# Altium PCB 660-XEMS91-CELLS.PcbDoc
Units mil, origin at the board's own origin, x right, y up, seen from the top; angles counter-clockwise.
Board outline 6222.84 x 4430.71 mil, 4 copper layers (Top Layer, MidLayer1, MidLayer2, Bottom Layer); 8 components, 0 nets, 5 pads, 0 vias.
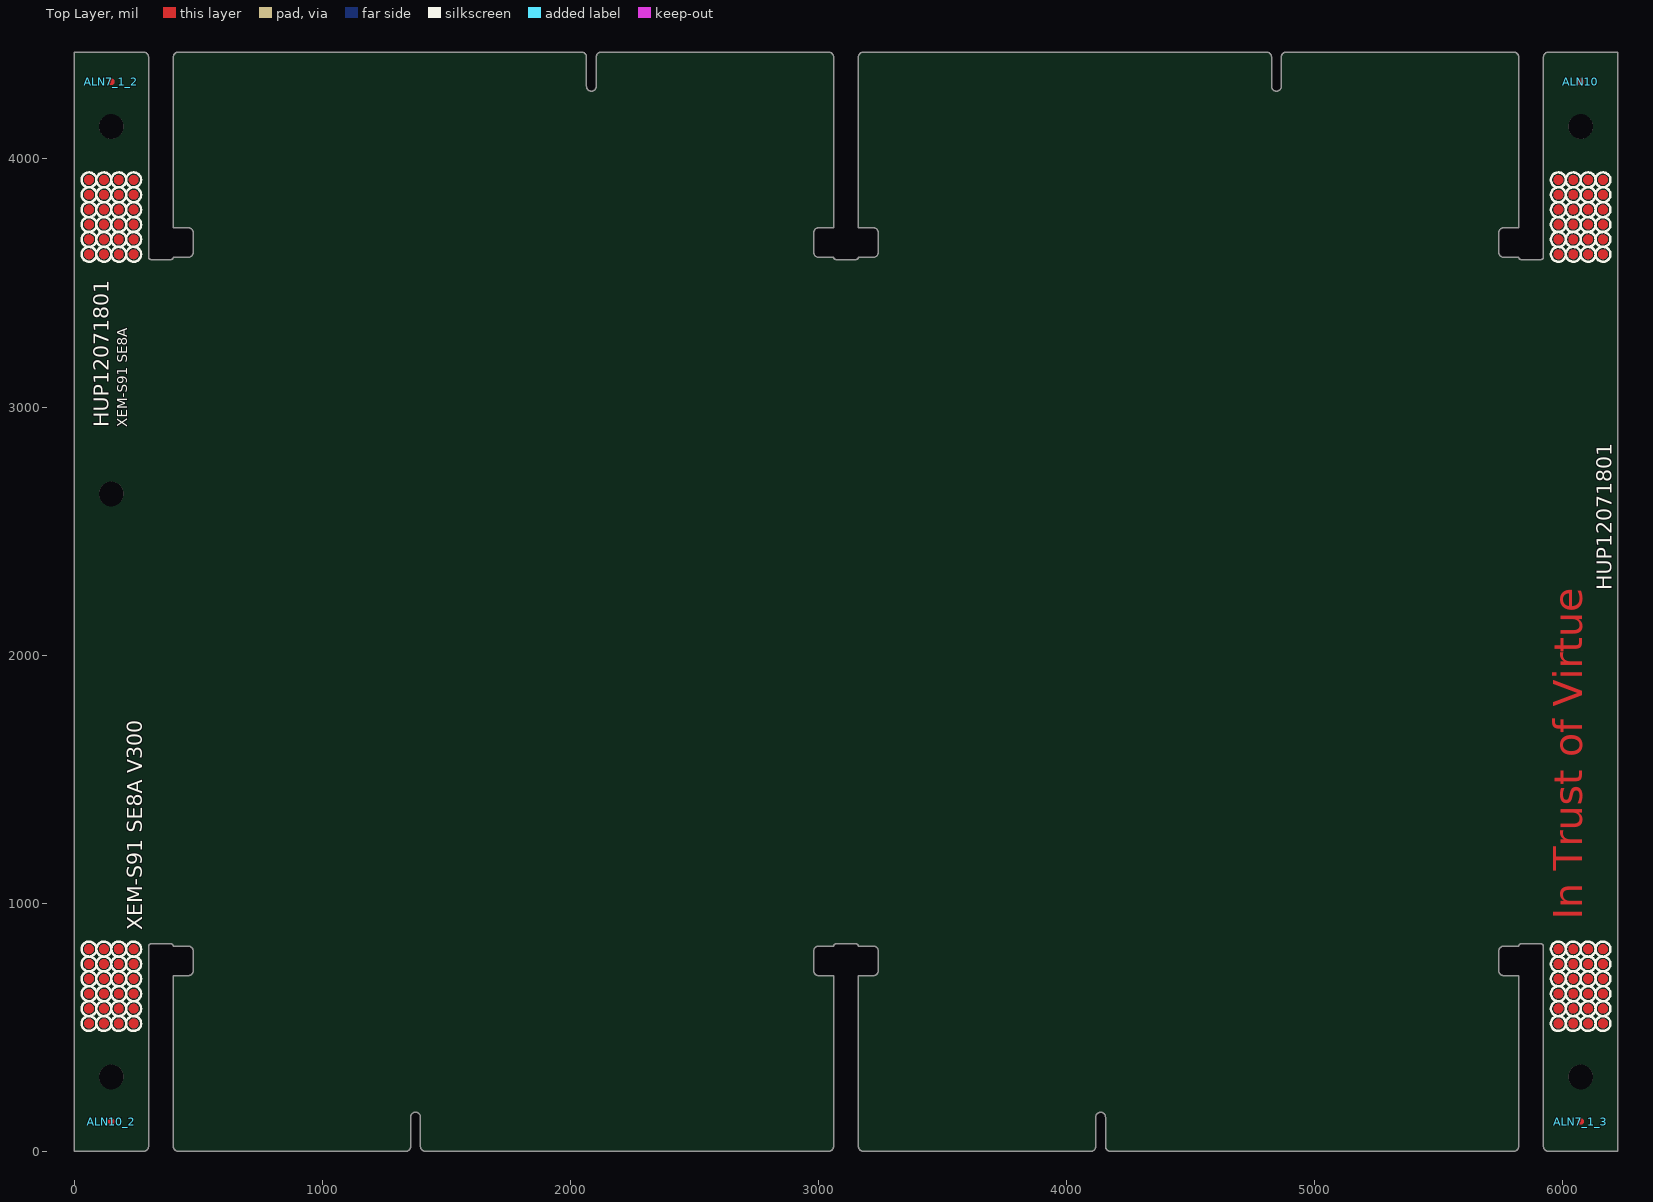
[diagram p0: Top Layer view]
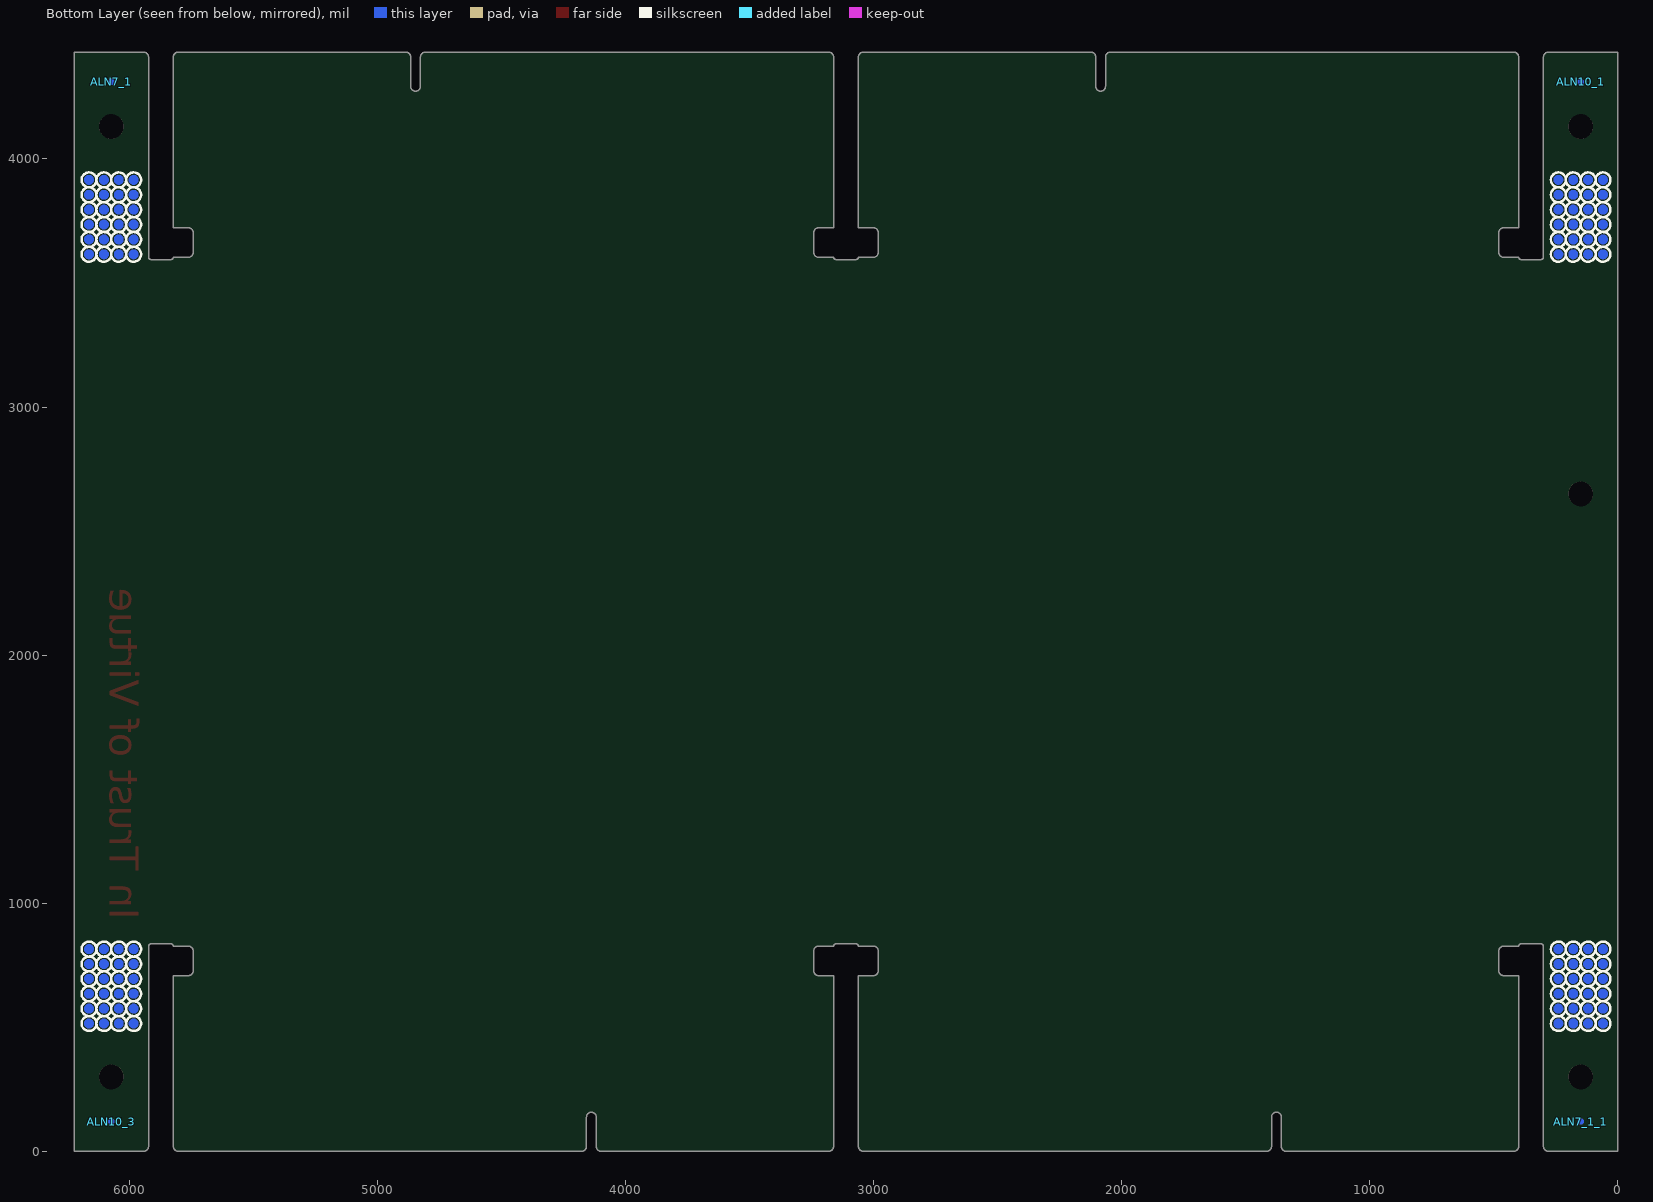
[diagram p1: Bottom Layer view, seen from below]
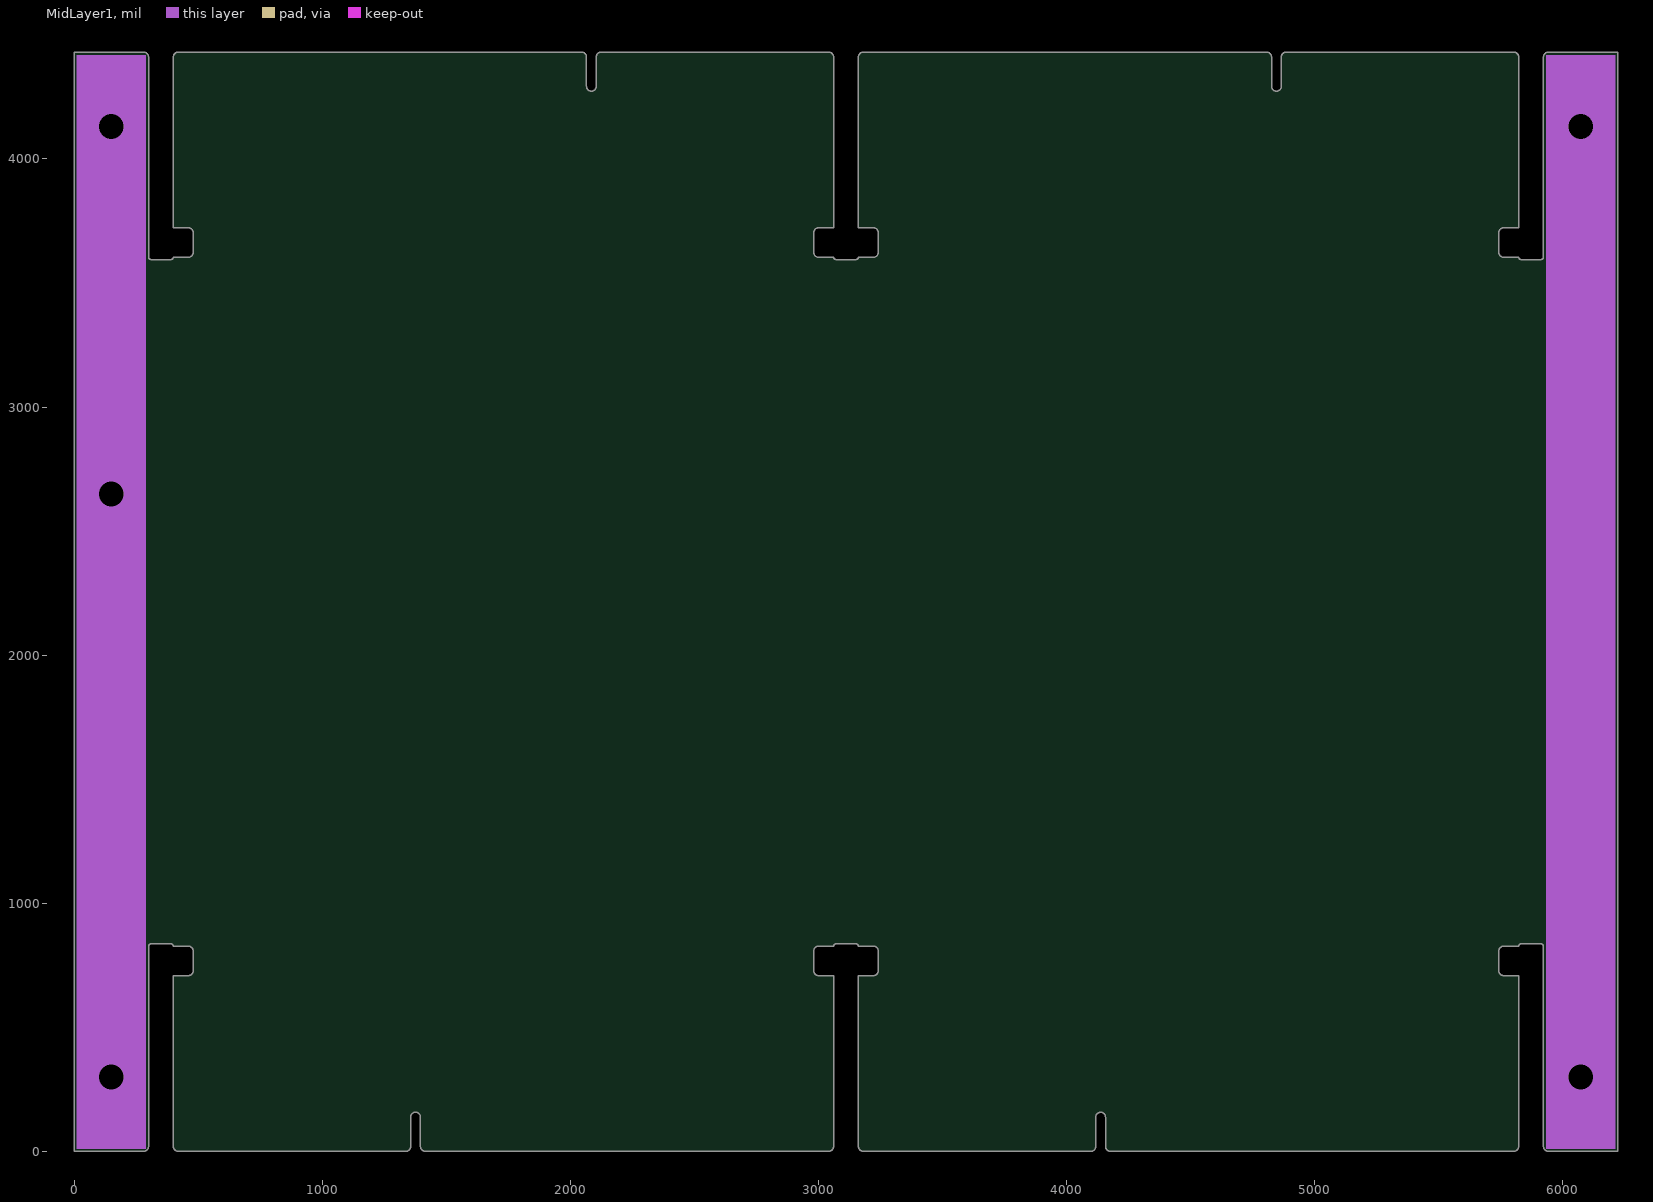
[diagram p2: MidLayer1]
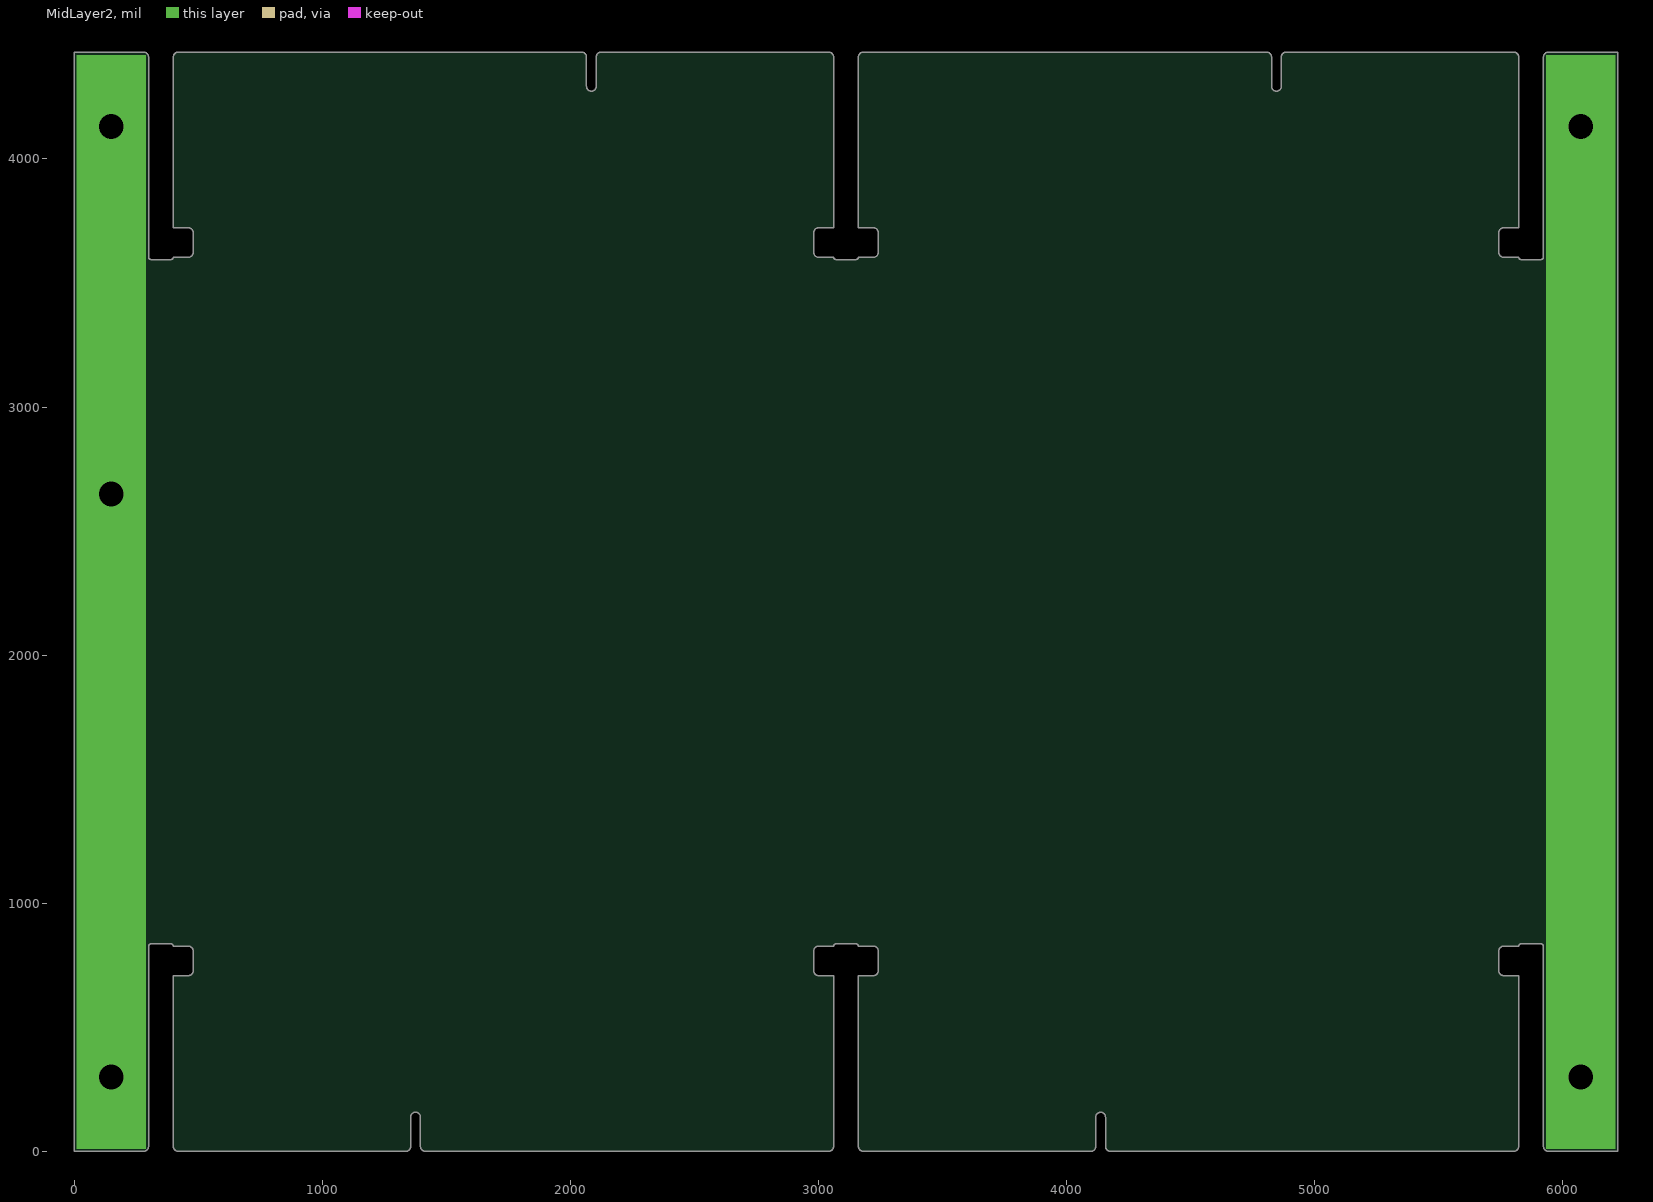
[diagram p3: MidLayer2]

## Layer stack, top to bottom
Top Layer: signal copper 1.4
Dielectric: core 12.6, FR-4, Dk 4.8
MidLayer1: signal copper 1.4
Dielectric: prepreg 12.6, FR-4, Dk 4.8
MidLayer2: signal copper 1.4
Dielectric: core 12.6, FR-4, Dk 4.8
Bottom Layer: signal copper 1.4

## Board outline
0,0 280.32,0 ccw(c280.32,19.68) 300,19.68 300,826.14 cw(c310,826.14) 310,836.14 390,836.14 cw(c390,826.14) 399.96,827 400,827 460,827 cw(c460,807) 480,807 480,728 cw(c460,728) 460,708 400,708 400,19.68 ccw(c419.68,19.68) 419.68,0 1337.01,0 ccw(c1337.01,19.68) 1356.69,19.68 1356.69,137.8 cw(c1376.38,137.8) 1396.06,137.8 1396.06,19.68 ccw(c1415.75,19.68) 1415.75,0 3041.73,0 ccw(c3041.73,19.68) 3061.42,19.68 3061.42,19.02 3061.42,708 3001.42,708 cw(c3001.42,728) 2981.42,728 2981.42,807 cw(c3001.42,807) 3001.42,827 3061.42,827 3061.45,827 cw(c3071.42,826.14) 3071.42,836.14 3151.42,836.14 cw(c3151.42,826.14) 3161.38,827 3161.42,827 3221.42,827 cw(c3221.42,807) 3241.42,807 3241.42,728 cw(c3221.42,728) 3221.42,708 3161.42,708 3161.42,19.68 ccw(c3181.1,19.68) 3181.1,0 4098.43,0 ccw(c4098.43,19.68) 4118.11,19.68 4118.11,137.8 cw(c4137.8,137.8) 4157.48,137.8 4157.48,19.68 ccw(c4177.17,19.68) 4177.17,0 5803.15,0 ccw(c5803.15,19.68) 5822.83,19.68 5822.83,19.02 5822.83,708 5762.83,708 cw(c5762.83,728) 5742.83,728 5742.83,807 cw(c5762.83,807) 5762.83,827 5822.83,827 5822.87,827 cw(c5832.84,826.14) 5832.84,836.14 5912.84,836.14 cw(c5912.84,826.14) 5922.84,826.14 5922.84,19.68 ccw(c5942.52,19.68) 5942.52,0 6222.84,0 6222.84,4430.71 5942.52,4430.71 ccw(c5942.52,4411.02) 5922.84,4411.02 5922.84,3604.57 cw(c5912.84,3604.57) 5912.84,3594.57 5832.84,3594.57 cw(c5832.84,3604.57) 5822.87,3603.71 5822.84,3603.71 5762.84,3603.71 cw(c5762.84,3623.71) 5742.84,3623.71 5742.84,3702.71 cw(c5762.84,3702.71) 5762.84,3722.71 5822.84,3722.71 5822.84,4411.02 ccw(c5803.15,4411.02) 5803.15,4430.71 4885.83,4430.71 ccw(c4885.83,4411.02) 4866.14,4411.02 4866.14,4292.91 cw(c4846.46,4292.91) 4826.77,4292.91 4826.77,4411.02 ccw(c4807.09,4411.02) 4807.09,4430.71 3181.1,4430.71 ccw(c3181.1,4411.02) 3161.42,4411.02 3161.42,4411.68 3161.42,3722.71 3221.42,3722.71 cw(c3221.42,3702.71) 3241.42,3702.71 3241.42,3623.71 cw(c3221.42,3623.71) 3221.42,3603.71 3161.42,3603.71 3161.38,3603.71 cw(c3151.42,3604.57) 3151.42,3594.57 3071.42,3594.57 cw(c3071.42,3604.57) 3061.46,3603.71 3061.42,3603.71 3001.42,3603.71 cw(c3001.42,3623.71) 2981.42,3623.71 2981.42,3702.71 cw(c3001.42,3702.71) 3001.42,3722.71 3061.42,3722.71 3061.42,4411.02 ccw(c3041.73,4411.02) 3041.73,4430.71 2124.41,4430.71 ccw(c2124.41,4411.02) 2104.73,4411.02 2104.73,4292.91 cw(c2085.04,4292.91) 2065.36,4292.91 2065.36,4411.02 ccw(c2045.67,4411.02) 2045.67,4430.71 419.69,4430.71 ccw(c419.69,4411.02) 400,4411.02 400,4411.68 400,3722.71 460,3722.71 cw(c460,3702.71) 480,3702.71 480,3623.71 cw(c460,3623.71) 460,3603.71 400,3603.71 399.96,3603.71 cw(c390,3604.57) 390,3594.57 310,3594.57 cw(c310,3604.57) 300,3604.57 300,4411.02 ccw(c280.32,4411.02) 280.32,4430.71 0,4430.71

## Design rules (kind name [scope] priority, off if disabled: settings)
Clearance [All] p1: gap=10
FabricationTestPointUsage TestPointUsage [All] p1: valid=0 allowmultiple=FALSE
FabricationTestpoint Testpoint [All] p1: side=3 testpointundercomponent=TRUE minsize=40 maxsize=100 preferedsize=60 minholesize=0 maxholesize=40 preferedholesize=32 testpointgrid=1 allowsidetop=TRUE allowsidebottom=TRUE usegrid=TRUE gridtolerance=0.01
PolygonConnect [All] p1: connectstyle=Relief reliefconductorwidth=10 reliefentries=4 polygonreliefangle="90 Angle"
RoutingVias [All] p1: holewidth=28 width=50 viastyle="Through Hole" minholewidth=28 minwidth=50 maxholewidth=28 maxwidth=50
SilkscreenOverComponentPads [All] p1: minsilkscreentomaskgap=10
SolderMaskExpansion [All] p1: expansion=4
Width [All] p1: maxlimit=100 minlimit=5 preferedwidth=10
25 further rules are at their usual default settings.

## Components (designator, comment, footprint, x,y, rotation, side; value= is the part's Value field where it differs from the comment)
ALN7_1 "Test Point" ALIGN 6072.84,4310.71 r180 bottom (schematic designator ALN6)
ALN7_1_1 "Test Point" ALIGN 150,120 r0 bottom (schematic designator ALN6)
ALN7_1_2 "Test Point" ALIGN 150,4310.71 r0 top (schematic designator ALN6)
ALN7_1_3 "Test Point" ALIGN 6072.84,120 r180 top (schematic designator ALN6)
ALN10 "Test Point" ALIGN 6072.84,4310.71 r0 top (schematic designator ALN6)
ALN10_1 "Test Point" ALIGN 150,4310.71 r180 bottom (schematic designator ALN6)
ALN10_2 "Test Point" ALIGN 150,120 r180 top (schematic designator ALN6)
ALN10_3 "Test Point" ALIGN 6072.84,120 r0 bottom (schematic designator ALN6)

## Footprints (in the part's own frame and the unit in brackets; to place one, negate y for a bottom-side part, rotate by r counter-clockwise, add the part's x,y. Pads: shape width x height; smd on the part's side, far side on the other; paste and mask are expansions set on the pad)
ALIGN [mil]
  Top Layer circle w16: c0,0 r5

## Part data
ALN7_1 ALN7_1_1 ALN7_1_2 ALN7_1_3 ALN10 ALN10_1 ALN10_2 ALN10_3: library part ALIGN

## Free pads (board coordinates)
  round 98 hole 100: 0(150,300) 0(150,2650) 0(150,4130.71) 0(6072.84,300) 0(6072.84,4130.71)

## Nets (pads, with @x,y where several pads share a name; then routed paths per layer and width w, separated by ;. In a path a pad name is that pad's centre, name@x,y a point inside that pad or via, vN(x,y) a via of type N, cw(c..) or ccw(c..) an arc to the next point about the centre after c; other vN are vias at no path point)
copper on no net: | length 12063.7
  Top Layer w20: 70,515 ccw(c60,515) 70,515 ; 70,575 ccw(c60,575) 70,575 ; 70,635 ccw(c60,635) 70,635 ; 70,695 ccw(c60,695) 70,695 ; 70,755 ccw(c60,755) 70,755 ; 70,815 ccw(c60,815) 70,815 ; 70,3615.71 ccw(c60,3615.71) 70,3615.71 ; 70,3675.71 ccw(c60,3675.71) 70,3675.71 ; 70,3735.71 ccw(c60,3735.71) 70,3735.71 ; 70,3795.71 ccw(c60,3795.71) 70,3795.71 ; 70,3855.71 ccw(c60,3855.71) 70,3855.71 ; 70,3915.71 ccw(c60,3915.71) 70,3915.71 ; 130,515 ccw(c120,515) 130,515 ; 130,575 ccw(c120,575) 130,575 ; 130,635 ccw(c120,635) 130,635 ; 130,695 ccw(c120,695) 130,695 ; 130,755 ccw(c120,755) 130,755 ; 130,815 ccw(c120,815) 130,815 ; 130,3615.71 ccw(c120,3615.71) 130,3615.71 ; 130,3675.71 ccw(c120,3675.71) 130,3675.71 ; 130,3735.71 ccw(c120,3735.71) 130,3735.71 ; 130,3795.71 ccw(c120,3795.71) 130,3795.71 ; 130,3855.71 ccw(c120,3855.71) 130,3855.71 ; 130,3915.71 ccw(c120,3915.71) 130,3915.71 ; 190,515 ccw(c180,515) 190,515 ; 190,575 ccw(c180,575) 190,575 ; 190,635 ccw(c180,635) 190,635 ; 190,695 ccw(c180,695) 190,695 ; 190,755 ccw(c180,755) 190,755 ; 190,815 ccw(c180,815) 190,815 ; 190,3615.71 ccw(c180,3615.71) 190,3615.71 ; 190,3675.71 ccw(c180,3675.71) 190,3675.71 ; 190,3735.71 ccw(c180,3735.71) 190,3735.71 ; 190,3795.71 ccw(c180,3795.71) 190,3795.71 ; 190,3855.71 ccw(c180,3855.71) 190,3855.71 ; 190,3915.71 ccw(c180,3915.71) 190,3915.71 ; 250,515 ccw(c240,515) 250,515 ; 250,575 ccw(c240,575) 250,575 ; 250,635 ccw(c240,635) 250,635 ; 250,695 ccw(c240,695) 250,695 ; 250,755 ccw(c240,755) 250,755 ; 250,815 ccw(c240,815) 250,815 ; 250,3615.71 ccw(c240,3615.71) 250,3615.71 ; 250,3675.71 ccw(c240,3675.71) 250,3675.71 ; 250,3735.71 ccw(c240,3735.71) 250,3735.71 ; 250,3795.71 ccw(c240,3795.71) 250,3795.71 ; 250,3855.71 ccw(c240,3855.71) 250,3855.71 ; 250,3915.71 ccw(c240,3915.71) 250,3915.71 ; 5992.84,515 ccw(c5982.84,515) 5992.84,515 ; 5992.84,575 ccw(c5982.84,575) 5992.84,575 ; 5992.84,635 ccw(c5982.84,635) 5992.84,635 ; 5992.84,695 ccw(c5982.84,695) 5992.84,695 ; 5992.84,755 ccw(c5982.84,755) 5992.84,755 ; 5992.84,815 ccw(c5982.84,815) 5992.84,815 ; 5992.84,3615.71 ccw(c5982.84,3615.71) 5992.84,3615.71 ; 5992.84,3675.71 ccw(c5982.84,3675.71) 5992.84,3675.71 ; 5992.84,3735.71 ccw(c5982.84,3735.71) 5992.84,3735.71 ; 5992.84,3795.71 ccw(c5982.84,3795.71) 5992.84,3795.71 ; 5992.84,3855.71 ccw(c5982.84,3855.71) 5992.84,3855.71 ; 5992.84,3915.71 ccw(c5982.84,3915.71) 5992.84,3915.71 ; 6052.84,515 ccw(c6042.84,515) 6052.84,515 ; 6052.84,575 ccw(c6042.84,575) 6052.84,575 ; 6052.84,635 ccw(c6042.84,635) 6052.84,635 ; 6052.84,695 ccw(c6042.84,695) 6052.84,695 ; 6052.84,755 ccw(c6042.84,755) 6052.84,755 ; 6052.84,815 ccw(c6042.84,815) 6052.84,815 ; 6052.84,3615.71 ccw(c6042.84,3615.71) 6052.84,3615.71 ; 6052.84,3675.71 ccw(c6042.84,3675.71) 6052.84,3675.71 ; 6052.84,3735.71 ccw(c6042.84,3735.71) 6052.84,3735.71 ; 6052.84,3795.71 ccw(c6042.84,3795.71) 6052.84,3795.71 ; 6052.84,3855.71 ccw(c6042.84,3855.71) 6052.84,3855.71 ; 6052.84,3915.71 ccw(c6042.84,3915.71) 6052.84,3915.71 ; 6112.84,515 ccw(c6102.84,515) 6112.84,515 ; 6112.84,575 ccw(c6102.84,575) 6112.84,575 ; 6112.84,635 ccw(c6102.84,635) 6112.84,635 ; 6112.84,695 ccw(c6102.84,695) 6112.84,695 ; 6112.84,755 ccw(c6102.84,755) 6112.84,755 ; 6112.84,815 ccw(c6102.84,815) 6112.84,815 ; 6112.84,3615.71 ccw(c6102.84,3615.71) 6112.84,3615.71 ; 6112.84,3675.71 ccw(c6102.84,3675.71) 6112.84,3675.71 ; 6112.84,3735.71 ccw(c6102.84,3735.71) 6112.84,3735.71 ; 6112.84,3795.71 ccw(c6102.84,3795.71) 6112.84,3795.71 ; 6112.84,3855.71 ccw(c6102.84,3855.71) 6112.84,3855.71 ; 6112.84,3915.71 ccw(c6102.84,3915.71) 6112.84,3915.71 ; 6172.84,515 ccw(c6162.84,515) 6172.84,515 ; 6172.84,575 ccw(c6162.84,575) 6172.84,575 ; 6172.84,635 ccw(c6162.84,635) 6172.84,635 ; 6172.84,695 ccw(c6162.84,695) 6172.84,695 ; 6172.84,755 ccw(c6162.84,755) 6172.84,755 ; 6172.84,815 ccw(c6162.84,815) 6172.84,815 ; 6172.84,3615.71 ccw(c6162.84,3615.71) 6172.84,3615.71 ; 6172.84,3675.71 ccw(c6162.84,3675.71) 6172.84,3675.71 ; 6172.84,3735.71 ccw(c6162.84,3735.71) 6172.84,3735.71 ; 6172.84,3795.71 ccw(c6162.84,3795.71) 6172.84,3795.71 ; 6172.84,3855.71 ccw(c6162.84,3855.71) 6172.84,3855.71 ; 6172.84,3915.71 ccw(c6162.84,3915.71) 6172.84,3915.71
  Bottom Layer w20: 70,515 ccw(c60,515) 70,515 ; 70,575 ccw(c60,575) 70,575 ; 70,635 ccw(c60,635) 70,635 ; 70,695 ccw(c60,695) 70,695 ; 70,755 ccw(c60,755) 70,755 ; 70,815 ccw(c60,815) 70,815 ; 70,3615.71 ccw(c60,3615.71) 70,3615.71 ; 70,3675.71 ccw(c60,3675.71) 70,3675.71 ; 70,3735.71 ccw(c60,3735.71) 70,3735.71 ; 70,3795.71 ccw(c60,3795.71) 70,3795.71 ; 70,3855.71 ccw(c60,3855.71) 70,3855.71 ; 70,3915.71 ccw(c60,3915.71) 70,3915.71 ; 130,515 ccw(c120,515) 130,515 ; 130,575 ccw(c120,575) 130,575 ; 130,635 ccw(c120,635) 130,635 ; 130,695 ccw(c120,695) 130,695 ; 130,755 ccw(c120,755) 130,755 ; 130,815 ccw(c120,815) 130,815 ; 130,3615.71 ccw(c120,3615.71) 130,3615.71 ; 130,3675.71 ccw(c120,3675.71) 130,3675.71 ; 130,3735.71 ccw(c120,3735.71) 130,3735.71 ; 130,3795.71 ccw(c120,3795.71) 130,3795.71 ; 130,3855.71 ccw(c120,3855.71) 130,3855.71 ; 130,3915.71 ccw(c120,3915.71) 130,3915.71 ; 190,515 ccw(c180,515) 190,515 ; 190,575 ccw(c180,575) 190,575 ; 190,635 ccw(c180,635) 190,635 ; 190,695 ccw(c180,695) 190,695 ; 190,755 ccw(c180,755) 190,755 ; 190,815 ccw(c180,815) 190,815 ; 190,3615.71 ccw(c180,3615.71) 190,3615.71 ; 190,3675.71 ccw(c180,3675.71) 190,3675.71 ; 190,3735.71 ccw(c180,3735.71) 190,3735.71 ; 190,3795.71 ccw(c180,3795.71) 190,3795.71 ; 190,3855.71 ccw(c180,3855.71) 190,3855.71 ; 190,3915.71 ccw(c180,3915.71) 190,3915.71 ; 250,515 ccw(c240,515) 250,515 ; 250,575 ccw(c240,575) 250,575 ; 250,635 ccw(c240,635) 250,635 ; 250,695 ccw(c240,695) 250,695 ; 250,755 ccw(c240,755) 250,755 ; 250,815 ccw(c240,815) 250,815 ; 250,3615.71 ccw(c240,3615.71) 250,3615.71 ; 250,3675.71 ccw(c240,3675.71) 250,3675.71 ; 250,3735.71 ccw(c240,3735.71) 250,3735.71 ; 250,3795.71 ccw(c240,3795.71) 250,3795.71 ; 250,3855.71 ccw(c240,3855.71) 250,3855.71 ; 250,3915.71 ccw(c240,3915.71) 250,3915.71 ; 5992.84,515 ccw(c5982.84,515) 5992.84,515 ; 5992.84,575 ccw(c5982.84,575) 5992.84,575 ; 5992.84,635 ccw(c5982.84,635) 5992.84,635 ; 5992.84,695 ccw(c5982.84,695) 5992.84,695 ; 5992.84,755 ccw(c5982.84,755) 5992.84,755 ; 5992.84,815 ccw(c5982.84,815) 5992.84,815 ; 5992.84,3615.71 ccw(c5982.84,3615.71) 5992.84,3615.71 ; 5992.84,3675.71 ccw(c5982.84,3675.71) 5992.84,3675.71 ; 5992.84,3735.71 ccw(c5982.84,3735.71) 5992.84,3735.71 ; 5992.84,3795.71 ccw(c5982.84,3795.71) 5992.84,3795.71 ; 5992.84,3855.71 ccw(c5982.84,3855.71) 5992.84,3855.71 ; 5992.84,3915.71 ccw(c5982.84,3915.71) 5992.84,3915.71 ; 6052.84,515 ccw(c6042.84,515) 6052.84,515 ; 6052.84,575 ccw(c6042.84,575) 6052.84,575 ; 6052.84,635 ccw(c6042.84,635) 6052.84,635 ; 6052.84,695 ccw(c6042.84,695) 6052.84,695 ; 6052.84,755 ccw(c6042.84,755) 6052.84,755 ; 6052.84,815 ccw(c6042.84,815) 6052.84,815 ; 6052.84,3615.71 ccw(c6042.84,3615.71) 6052.84,3615.71 ; 6052.84,3675.71 ccw(c6042.84,3675.71) 6052.84,3675.71 ; 6052.84,3735.71 ccw(c6042.84,3735.71) 6052.84,3735.71 ; 6052.84,3795.71 ccw(c6042.84,3795.71) 6052.84,3795.71 ; 6052.84,3855.71 ccw(c6042.84,3855.71) 6052.84,3855.71 ; 6052.84,3915.71 ccw(c6042.84,3915.71) 6052.84,3915.71 ; 6112.84,515 ccw(c6102.84,515) 6112.84,515 ; 6112.84,575 ccw(c6102.84,575) 6112.84,575 ; 6112.84,635 ccw(c6102.84,635) 6112.84,635 ; 6112.84,695 ccw(c6102.84,695) 6112.84,695 ; 6112.84,755 ccw(c6102.84,755) 6112.84,755 ; 6112.84,815 ccw(c6102.84,815) 6112.84,815 ; 6112.84,3615.71 ccw(c6102.84,3615.71) 6112.84,3615.71 ; 6112.84,3675.71 ccw(c6102.84,3675.71) 6112.84,3675.71 ; 6112.84,3735.71 ccw(c6102.84,3735.71) 6112.84,3735.71 ; 6112.84,3795.71 ccw(c6102.84,3795.71) 6112.84,3795.71 ; 6112.84,3855.71 ccw(c6102.84,3855.71) 6112.84,3855.71 ; 6112.84,3915.71 ccw(c6102.84,3915.71) 6112.84,3915.71 ; 6172.84,515 ccw(c6162.84,515) 6172.84,515 ; 6172.84,575 ccw(c6162.84,575) 6172.84,575 ; 6172.84,635 ccw(c6162.84,635) 6172.84,635 ; 6172.84,695 ccw(c6162.84,695) 6172.84,695 ; 6172.84,755 ccw(c6162.84,755) 6172.84,755 ; 6172.84,815 ccw(c6162.84,815) 6172.84,815 ; 6172.84,3615.71 ccw(c6162.84,3615.71) 6172.84,3615.71 ; 6172.84,3675.71 ccw(c6162.84,3675.71) 6172.84,3675.71 ; 6172.84,3735.71 ccw(c6162.84,3735.71) 6172.84,3735.71 ; 6172.84,3795.71 ccw(c6162.84,3795.71) 6172.84,3795.71 ; 6172.84,3855.71 ccw(c6162.84,3855.71) 6172.84,3855.71 ; 6172.84,3915.71 ccw(c6162.84,3915.71) 6172.84,3915.71

## Other copper
Top Layer:
  text "In Trust of Virtue" at 6116.73,933.05 h200 r90
MidLayer1:
  region: 6212.84,4420 5932.84,4420 5932.84,10 6212.84,10
  rectangle: 10,10 290,4420
MidLayer2:
  region: 6212.84,4420 5932.84,4420 5932.84,10 6212.84,10
  rectangle: 10,10 290,4420

## Silkscreen, mask and mechanical layers (free items; w line width, h text height)
Top Overlay:
  circle w10: c6162.84,755 r30
  circle w10: c6162.84,815 r30
  circle w10: c6162.84,635 r30
  circle w10: c6162.84,695 r30
  circle w10: c6162.84,515 r30
  circle w10: c6162.84,575 r30
  circle w10: c6102.84,815 r30
  circle w10: c6102.84,755 r30
  circle w10: c6102.84,575 r30
  circle w10: c6102.84,515 r30
  circle w10: c6102.84,695 r30
  circle w10: c6102.84,635 r30
  circle w10: c6042.84,815 r30
  circle w10: c5982.84,815 r30
  circle w10: c5982.84,755 r30
  circle w10: c6042.84,755 r30
  circle w10: c6042.84,575 r30
  circle w10: c5982.84,575 r30
  circle w10: c5982.84,515 r30
  circle w10: c6042.84,515 r30
  circle w10: c6042.84,695 r30
  circle w10: c5982.84,695 r30
  circle w10: c5982.84,635 r30
  circle w10: c6042.84,635 r30
  circle w10: c5982.84,3675.71 r30
  circle w10: c5982.84,3615.71 r30
  circle w10: c5982.84,3795.71 r30
  circle w10: c5982.84,3735.71 r30
  circle w10: c5982.84,3915.71 r30
  circle w10: c5982.84,3855.71 r30
  circle w10: c6042.84,3615.71 r30
  circle w10: c6042.84,3675.71 r30
  circle w10: c6042.84,3855.71 r30
  circle w10: c6042.84,3915.71 r30
  circle w10: c6042.84,3735.71 r30
  circle w10: c6042.84,3795.71 r30
  circle w10: c6102.84,3615.71 r30
  circle w10: c6162.84,3615.71 r30
  circle w10: c6162.84,3675.71 r30
  circle w10: c6102.84,3675.71 r30
  circle w10: c6102.84,3855.71 r30
  circle w10: c6162.84,3855.71 r30
  circle w10: c6162.84,3915.71 r30
  circle w10: c6102.84,3915.71 r30
  circle w10: c6102.84,3735.71 r30
  circle w10: c6162.84,3735.71 r30
  circle w10: c6162.84,3795.71 r30
  circle w10: c6102.84,3795.71 r30
  circle w10: c60,3675.71 r30
  circle w10: c60,3615.71 r30
  circle w10: c60,3795.71 r30
  circle w10: c60,3735.71 r30
  circle w10: c60,3915.71 r30
  circle w10: c60,3855.71 r30
  circle w10: c120,3615.71 r30
  circle w10: c120,3675.71 r30
  circle w10: c120,3855.71 r30
  circle w10: c120,3915.71 r30
  circle w10: c120,3735.71 r30
  circle w10: c120,3795.71 r30
  circle w10: c180,3615.71 r30
  circle w10: c240,3615.71 r30
  circle w10: c240,3675.71 r30
  circle w10: c180,3675.71 r30
  circle w10: c180,3855.71 r30
  circle w10: c240,3855.71 r30
  circle w10: c240,3915.71 r30
  circle w10: c180,3915.71 r30
  circle w10: c180,3735.71 r30
  circle w10: c240,3735.71 r30
  circle w10: c240,3795.71 r30
  circle w10: c180,3795.71 r30
  circle w10: c120,635 r30
  circle w10: c60,635 r30
  circle w10: c60,695 r30
  circle w10: c120,695 r30
  circle w10: c120,515 r30
  circle w10: c60,515 r30
  circle w10: c60,575 r30
  circle w10: c120,575 r30
  circle w10: c120,755 r30
  circle w10: c60,755 r30
  circle w10: c60,815 r30
  circle w10: c120,815 r30
  circle w10: c180,635 r30
  circle w10: c180,695 r30
  circle w10: c180,515 r30
  circle w10: c180,575 r30
  circle w10: c180,755 r30
  circle w10: c180,815 r30
  circle w10: c240,575 r30
  circle w10: c240,515 r30
  circle w10: c240,695 r30
  circle w10: c240,635 r30
  circle w10: c240,815 r30
  circle w10: c240,755 r30
  text "HUP12071801" at 140,2919.29 h60 r90
  text "XEM-S91 SE8A" at 215,2919.29 h40 r90
  text "HUP12071801" at 6197.84,2260.71 h60 r90
  text "XEM-S91 SE8A V300" at 275,890 h60 r90
Bottom Overlay:
  circle w10: c6102.84,635 r30
  circle w10: c6162.84,635 r30
  circle w10: c6162.84,695 r30
  circle w10: c6102.84,695 r30
  circle w10: c6102.84,515 r30
  circle w10: c6162.84,515 r30
  circle w10: c6162.84,575 r30
  circle w10: c6102.84,575 r30
  circle w10: c6102.84,755 r30
  circle w10: c6162.84,755 r30
  circle w10: c6162.84,815 r30
  circle w10: c6102.84,815 r30
  circle w10: c6042.84,635 r30
  circle w10: c6042.84,695 r30
  circle w10: c6042.84,515 r30
  circle w10: c6042.84,575 r30
  circle w10: c6042.84,755 r30
  circle w10: c6042.84,815 r30
  circle w10: c5982.84,575 r30
  circle w10: c5982.84,515 r30
  circle w10: c5982.84,695 r30
  circle w10: c5982.84,635 r30
  circle w10: c5982.84,815 r30
  circle w10: c5982.84,755 r30
  circle w10: c6042.84,3795.71 r30
  circle w10: c5982.84,3795.71 r30
  circle w10: c5982.84,3735.71 r30
  circle w10: c6042.84,3735.71 r30
  circle w10: c6042.84,3915.71 r30
  circle w10: c5982.84,3915.71 r30
  circle w10: c5982.84,3855.71 r30
  circle w10: c6042.84,3855.71 r30
  circle w10: c6042.84,3675.71 r30
  circle w10: c5982.84,3675.71 r30
  circle w10: c5982.84,3615.71 r30
  circle w10: c6042.84,3615.71 r30
  circle w10: c6102.84,3795.71 r30
  circle w10: c6102.84,3735.71 r30
  circle w10: c6102.84,3915.71 r30
  circle w10: c6102.84,3855.71 r30
  circle w10: c6102.84,3675.71 r30
  circle w10: c6102.84,3615.71 r30
  circle w10: c6162.84,3855.71 r30
  circle w10: c6162.84,3915.71 r30
  circle w10: c6162.84,3735.71 r30
  circle w10: c6162.84,3795.71 r30
  circle w10: c6162.84,3615.71 r30
  circle w10: c6162.84,3675.71 r30
  circle w10: c120,3795.71 r30
  circle w10: c60,3795.71 r30
  circle w10: c60,3735.71 r30
  circle w10: c120,3735.71 r30
  circle w10: c120,3915.71 r30
  circle w10: c60,3915.71 r30
  circle w10: c60,3855.71 r30
  circle w10: c120,3855.71 r30
  circle w10: c120,3675.71 r30
  circle w10: c60,3675.71 r30
  circle w10: c60,3615.71 r30
  circle w10: c120,3615.71 r30
  circle w10: c180,3795.71 r30
  circle w10: c180,3735.71 r30
  circle w10: c180,3915.71 r30
  circle w10: c180,3855.71 r30
  circle w10: c180,3675.71 r30
  circle w10: c180,3615.71 r30
  circle w10: c240,3855.71 r30
  circle w10: c240,3915.71 r30
  circle w10: c240,3735.71 r30
  circle w10: c240,3795.71 r30
  circle w10: c240,3615.71 r30
  circle w10: c240,3675.71 r30
  circle w10: c60,755 r30
  circle w10: c60,815 r30
  circle w10: c60,635 r30
  circle w10: c60,695 r30
  circle w10: c60,515 r30
  circle w10: c60,575 r30
  circle w10: c120,815 r30
  circle w10: c120,755 r30
  circle w10: c120,575 r30
  circle w10: c120,515 r30
  circle w10: c120,695 r30
  circle w10: c120,635 r30
  circle w10: c180,815 r30
  circle w10: c240,815 r30
  circle w10: c240,755 r30
  circle w10: c180,755 r30
  circle w10: c180,575 r30
  circle w10: c240,575 r30
  circle w10: c240,515 r30
  circle w10: c180,515 r30
  circle w10: c180,695 r30
  circle w10: c240,695 r30
  circle w10: c240,635 r30
  circle w10: c180,635 r30
Top Solder:
  circle w24: c6162.84,815 r10
  circle w24: c6102.84,815 r10
  circle w24: c6102.84,755 r10
  circle w24: c6162.84,755 r10
  circle w24: c6162.84,575 r10
  circle w24: c6102.84,575 r10
  circle w24: c6102.84,515 r10
  circle w24: c6162.84,515 r10
  circle w24: c6162.84,695 r10
  circle w24: c6102.84,695 r10
  circle w24: c6102.84,635 r10
  circle w24: c6162.84,635 r10
  circle w24: c6042.84,815 r10
  circle w24: c5982.84,815 r10
  circle w24: c5982.84,755 r10
  circle w24: c6042.84,755 r10
  circle w24: c6042.84,575 r10
  circle w24: c5982.84,575 r10
  circle w24: c5982.84,515 r10
  circle w24: c6042.84,515 r10
  circle w24: c6042.84,695 r10
  circle w24: c5982.84,695 r10
  circle w24: c5982.84,635 r10
  circle w24: c6042.84,635 r10
  circle w24: c5982.84,3615.71 r10
  circle w24: c6042.84,3615.71 r10
  circle w24: c6042.84,3675.71 r10
  circle w24: c5982.84,3675.71 r10
  circle w24: c5982.84,3855.71 r10
  circle w24: c6042.84,3855.71 r10
  circle w24: c6042.84,3915.71 r10
  circle w24: c5982.84,3915.71 r10
  circle w24: c5982.84,3735.71 r10
  circle w24: c6042.84,3735.71 r10
  circle w24: c6042.84,3795.71 r10
  circle w24: c5982.84,3795.71 r10
  circle w24: c6102.84,3615.71 r10
  circle w24: c6162.84,3615.71 r10
  circle w24: c6162.84,3675.71 r10
  circle w24: c6102.84,3675.71 r10
  circle w24: c6102.84,3855.71 r10
  circle w24: c6162.84,3855.71 r10
  circle w24: c6162.84,3915.71 r10
  circle w24: c6102.84,3915.71 r10
  circle w24: c6102.84,3735.71 r10
  circle w24: c6162.84,3735.71 r10
  circle w24: c6162.84,3795.71 r10
  circle w24: c6102.84,3795.71 r10
  circle w24: c60,3615.71 r10
  circle w24: c120,3615.71 r10
  circle w24: c120,3675.71 r10
  circle w24: c60,3675.71 r10
  circle w24: c60,3855.71 r10
  circle w24: c120,3855.71 r10
  circle w24: c120,3915.71 r10
  circle w24: c60,3915.71 r10
  circle w24: c60,3735.71 r10
  circle w24: c120,3735.71 r10
  circle w24: c120,3795.71 r10
  circle w24: c60,3795.71 r10
  circle w24: c180,3615.71 r10
  circle w24: c240,3615.71 r10
  circle w24: c240,3675.71 r10
  circle w24: c180,3675.71 r10
  circle w24: c180,3855.71 r10
  circle w24: c240,3855.71 r10
  circle w24: c240,3915.71 r10
  circle w24: c180,3915.71 r10
  circle w24: c180,3735.71 r10
  circle w24: c240,3735.71 r10
  circle w24: c240,3795.71 r10
  circle w24: c180,3795.71 r10
  circle w24: c120,635 r10
  circle w24: c60,635 r10
  circle w24: c60,695 r10
  circle w24: c120,695 r10
  circle w24: c120,515 r10
  circle w24: c60,515 r10
  circle w24: c60,575 r10
  circle w24: c120,575 r10
  circle w24: c120,755 r10
  circle w24: c60,755 r10
  circle w24: c60,815 r10
  circle w24: c120,815 r10
  circle w24: c240,635 r10
  circle w24: c180,635 r10
  circle w24: c180,695 r10
  circle w24: c240,695 r10
  circle w24: c240,515 r10
  circle w24: c180,515 r10
  circle w24: c180,575 r10
  circle w24: c240,575 r10
  circle w24: c240,755 r10
  circle w24: c180,755 r10
  circle w24: c180,815 r10
  circle w24: c240,815 r10
  lines w20: 300,836.14 300,936.14 ; 300,1587.01 300,1687.01 ; 300,2743.7 300,2843.7 ; 300,3494.57 300,3594.57 ; 400,836.14 400,936.14 ; 400,1587.01 400,1687.01 ; 400,2743.7 400,2843.7 ; 400,3494.57 400,3594.57 ; 790,2165.35 890,2165.35 ; 790,2265.35 890,2265.35 ; 1680,2165.35 1780,2165.35 ; 1680,2265.35 1780,2265.35 ; 2571.42,2165.36 2671.42,2165.36 ; 2571.42,2265.36 2671.42,2265.36 ; 3061.42,836.14 3061.42,936.14 ; 3061.42,1587.01 3061.42,1687.01 ; 3061.42,2743.7 3061.42,2843.7 ; 3061.42,3494.57 3061.42,3594.57 ; 3161.42,836.14 3161.42,936.14 ; 3161.42,1587.01 3161.42,1687.01 ; 3161.42,2743.7 3161.42,2843.7 ; 3161.42,3494.57 3161.42,3594.57 ; 3551.42,2165.35 3651.42,2165.35 ; 3551.42,2265.35 3651.42,2265.35 ; 4441.42,2165.35 4541.42,2165.35 ; 4441.42,2265.35 4541.42,2265.35 ; 5332.84,2165.36 5432.84,2165.36 ; 5332.84,2265.36 5432.84,2265.36 ; 5822.84,836.14 5822.84,936.14 ; 5822.84,1587.01 5822.84,1687.01 ; 5822.84,2743.7 5822.84,2843.7 ; 5822.84,3494.57 5822.84,3594.57 ; 5922.84,836.14 5922.84,936.14 ; 5922.84,1587.01 5922.84,1687.01 ; 5922.84,2743.7 5922.84,2843.7 ; 5922.84,3494.57 5922.84,3594.57
  text "In Trust of Virtue" at 6116.73,933.05 h200 r90
Bottom Solder:
  circle w24: c6102.84,635 r10
  circle w24: c6162.84,635 r10
  circle w24: c6162.84,695 r10
  circle w24: c6102.84,695 r10
  circle w24: c6102.84,515 r10
  circle w24: c6162.84,515 r10
  circle w24: c6162.84,575 r10
  circle w24: c6102.84,575 r10
  circle w24: c6102.84,755 r10
  circle w24: c6162.84,755 r10
  circle w24: c6162.84,815 r10
  circle w24: c6102.84,815 r10
  circle w24: c5982.84,635 r10
  circle w24: c6042.84,635 r10
  circle w24: c6042.84,695 r10
  circle w24: c5982.84,695 r10
  circle w24: c5982.84,515 r10
  circle w24: c6042.84,515 r10
  circle w24: c6042.84,575 r10
  circle w24: c5982.84,575 r10
  circle w24: c5982.84,755 r10
  circle w24: c6042.84,755 r10
  circle w24: c6042.84,815 r10
  circle w24: c5982.84,815 r10
  circle w24: c6042.84,3795.71 r10
  circle w24: c5982.84,3795.71 r10
  circle w24: c5982.84,3735.71 r10
  circle w24: c6042.84,3735.71 r10
  circle w24: c6042.84,3915.71 r10
  circle w24: c5982.84,3915.71 r10
  circle w24: c5982.84,3855.71 r10
  circle w24: c6042.84,3855.71 r10
  circle w24: c6042.84,3675.71 r10
  circle w24: c5982.84,3675.71 r10
  circle w24: c5982.84,3615.71 r10
  circle w24: c6042.84,3615.71 r10
  circle w24: c6162.84,3795.71 r10
  circle w24: c6102.84,3795.71 r10
  circle w24: c6102.84,3735.71 r10
  circle w24: c6162.84,3735.71 r10
  circle w24: c6162.84,3915.71 r10
  circle w24: c6102.84,3915.71 r10
  circle w24: c6102.84,3855.71 r10
  circle w24: c6162.84,3855.71 r10
  circle w24: c6162.84,3675.71 r10
  circle w24: c6102.84,3675.71 r10
  circle w24: c6102.84,3615.71 r10
  circle w24: c6162.84,3615.71 r10
  circle w24: c120,3795.71 r10
  circle w24: c60,3795.71 r10
  circle w24: c60,3735.71 r10
  circle w24: c120,3735.71 r10
  circle w24: c120,3915.71 r10
  circle w24: c60,3915.71 r10
  circle w24: c60,3855.71 r10
  circle w24: c120,3855.71 r10
  circle w24: c120,3675.71 r10
  circle w24: c60,3675.71 r10
  circle w24: c60,3615.71 r10
  circle w24: c120,3615.71 r10
  circle w24: c240,3795.71 r10
  circle w24: c180,3795.71 r10
  circle w24: c180,3735.71 r10
  circle w24: c240,3735.71 r10
  circle w24: c240,3915.71 r10
  circle w24: c180,3915.71 r10
  circle w24: c180,3855.71 r10
  circle w24: c240,3855.71 r10
  circle w24: c240,3675.71 r10
  circle w24: c180,3675.71 r10
  circle w24: c180,3615.71 r10
  circle w24: c240,3615.71 r10
  circle w24: c60,815 r10
  circle w24: c120,815 r10
  circle w24: c120,755 r10
  circle w24: c60,755 r10
  circle w24: c60,575 r10
  circle w24: c120,575 r10
  circle w24: c120,515 r10
  circle w24: c60,515 r10
  circle w24: c60,695 r10
  circle w24: c120,695 r10
  circle w24: c120,635 r10
  circle w24: c60,635 r10
  circle w24: c180,815 r10
  circle w24: c240,815 r10
  circle w24: c240,755 r10
  circle w24: c180,755 r10
  circle w24: c180,575 r10
  circle w24: c240,575 r10
  circle w24: c240,515 r10
  circle w24: c180,515 r10
  circle w24: c180,695 r10
  circle w24: c240,695 r10
  circle w24: c240,635 r10
  circle w24: c180,635 r10
  lines w20: 300,836.14 300,936.14 ; 300,1587.01 300,1687.01 ; 300,2743.7 300,2843.7 ; 300,3494.57 300,3594.57 ; 400,836.14 400,936.14 ; 400,1587.01 400,1687.01 ; 400,2743.7 400,2843.7 ; 400,3494.57 400,3594.57 ; 790,2165.35 890,2165.35 ; 790,2265.35 890,2265.35 ; 1680,2165.35 1780,2165.35 ; 1680,2265.35 1780,2265.35 ; 2571.42,2165.36 2671.42,2165.36 ; 2571.42,2265.36 2671.42,2265.36 ; 3061.42,836.14 3061.42,936.14 ; 3061.42,1587.01 3061.42,1687.01 ; 3061.42,2743.7 3061.42,2843.7 ; 3061.42,3494.57 3061.42,3594.57 ; 3161.42,836.14 3161.42,936.14 ; 3161.42,1587.01 3161.42,1687.01 ; 3161.42,2743.7 3161.42,2843.7 ; 3161.42,3494.57 3161.42,3594.57 ; 3551.42,2165.35 3651.42,2165.35 ; 3551.42,2265.35 3651.42,2265.35 ; 4441.42,2165.35 4541.42,2165.35 ; 4441.42,2265.35 4541.42,2265.35 ; 5332.84,2165.36 5432.84,2165.36 ; 5332.84,2265.36 5432.84,2265.36 ; 5822.84,836.14 5822.84,936.14 ; 5822.84,1587.01 5822.84,1687.01 ; 5822.84,2743.7 5822.84,2843.7 ; 5822.84,3494.57 5822.84,3594.57 ; 5922.84,836.14 5922.84,936.14 ; 5922.84,1587.01 5922.84,1687.01 ; 5922.84,2743.7 5922.84,2843.7 ; 5922.84,3494.57 5922.84,3594.57
Mechanical 1:
  drawing of 461 lines, arcs and shapes, not listed